# EAGLE board PCB_2.1 (EAGLE 7.6.0)
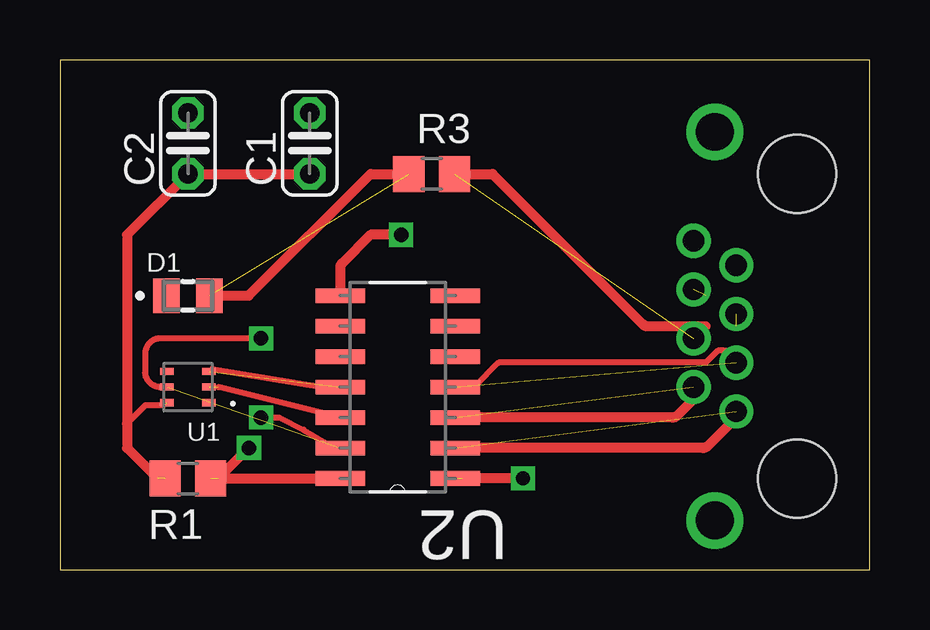
[diagram p0: board, top side]
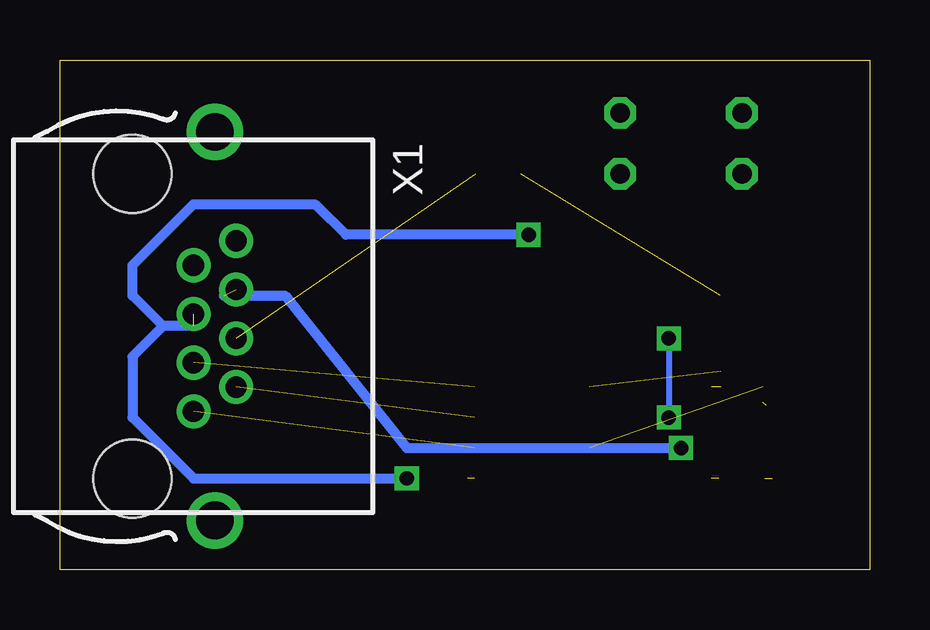
[diagram p1: board, bottom side, seen from below]

Size 33.76 x 21.26 mm. Coordinates in mm from the lower left corner, seen from the top.
Outline: 0,0 33.76,0 33.76,21.26 0,21.26 0,0
Copper layers (1*16): Top 0.035mm / dielectric 1.5mm / Bottom 0.035mm
Design rules "default": minimum track width 10mil, minimum drill 24mil, track to track 8mil, track to pad 8mil, pad to pad 8mil, via to via 8mil, smd to smd 8mil, copper to edge 40mil, drill to drill 8mil, minimum pad ring 10mil, minimum via ring 8mil, stop-mask expansion 4mil, vias tented up to drill 0mil, thermal gap 10mil
tRestrict: 8 lines

## Footprints (pad centres in the part's own frame; a part is rotated, then mirrored left to right if it is on the bottom)
C025-024X044 = drill 0.813 octagon: 1 -1.27,0; 2 1.27,0
LEDC2012X70N = smd 1.1 x 1.45: A 0.9,0; C -0.9,0
R0805 = smd 1.3 x 1.5: 1 -0.95,0; 2 0.95,0
VISHAY_VEML6030_2X2X0.87 = smd 0.55 x 0.3: 1 -0.875,0.65; 2 -0.875,0; 3 -0.875,-0.65; 4 0.875,-0.65; 5 0.875,0; 6 0.875,0.65
SOIC127P600X175-14N = smd 2.057 x 0.61: 1 -4.801,7.62; 2 -4.801,6.35; 3 -4.801,5.08; 4 -4.801,3.81; 5 -4.801,2.54; 6 -4.801,1.27; 7 -4.801,0; 8 0,0; 9 0,1.27; 10 0,2.54; 11 0,3.81; 12 0,5.08; 13 0,6.35; 14 0,7.62
0446200002 = drill 0.889 pad 1.422: 1 3.556,2.54; 2 2.54,4.318; 3 1.524,2.54; 4 0.508,4.318; 5 -0.508,2.54; 6 -1.524,4.318; 7 -2.54,2.54; 8 -3.556,4.318 | drill 1.575 pad 2.286: S@1 -8.103,3.429; S@2 8.103,3.429 | hole 3.251: 6.35,0; -6.35,0

## Placement (x,y rotation side)
C1  [C025-024X044]  10.41,17.78 90 top
C2  [C025-024X044]  5.33,17.78 90 top
D1  5988170107F  [LEDC2012X70N]  5.33,11.43 0 top
R1  [R0805]  5.33,3.81 180 top
R3  [R0805]  15.49,16.51 0 top
U1  VEML6030  [VISHAY_VEML6030_2X2X0.87]  5.33,7.62 180 top
U2  TXS0104ED  [SOIC127P600X175-14N]  11.68,11.43 180 top
X1  0446200002  [0446200002]  30.73,10.16 270 bottom

## Library data of the parts
C1 C2 R1 R3 = resistor
D1 = 5988170107F; AVAILABILITY: Unavailable; DESCRIPTION: LED GREEN CLEAR 0805 SMD; MF: Dialight; MP: 5988170107F; PACKAGE: 0805 Dialight; PRICE: None
U1 = VEML6030; AVAILABILITY: Unavailable; DESCRIPTION: VEML6030 Series 2 x 2 x 0.85 mm 50 mW I2C High Accuracy Ambient Light Sensor; MF: Vishay; MP: VEML6030; PACKAGE: SMD-6 Vishay; PRICE: None
U2 = TXS0104ED; AVAILABILITY: Unavailable; DESCRIPTION: 4-Bit Bidirectional Voltage-Level Shifter for Open-Drain and Push-Pull Applications 14-SOIC -40 to 85; MF: Texas Instruments; MP: TXS0104ED; PACKAGE: SOIC-14 Texas Instruments; PRICE: None
X1 = 0446200002; AVAILABILITY: Unavailable; DESCRIPTION: Conn RJ-45 RCP 8 POS 2.04mm Solder RA Thru-Hole 8 Terminal 1 Port Tray Cat 3; MF: Molex, LLC; MP: 0446200002; PACKAGE: None; PRICE: None

## Nets
GND: U1.1
N$1: C1.1 C2.1 R1.2 U1.6
N$3: U1.5 U2.13
N$4: U1.3 U2.11
N$5: U1.2 U2.12
N$6: D1.A R3.1
N$7: U2.2 X1.1
N$8: U2.3 X1.2
N$9: U2.4 X1.3
N$10: R1.1 U2.14 X1.6
N$12: R3.2 X1.4
N$17: U2.1 U2.8 X1.5

## Tracks (layer width: path | path; a pad name or v marks a point on that pad's centre or on a via)
N$1  (2 unrouted)
  Top 0.254: 4.32,6.86 3.56,6.86 2.79,6.1
  Top 0.406: C1.1 C2.1 2.79,13.97 2.79,6.1 2.79,5.08 4.06,3.81
N$2
  Top 0.406: 16.76,16.51 18.03,16.51 24.31,10.23 arc45 24.49,10.16 26.92,10.16
N$3  (1 unrouted)
N$4  (1 unrouted)
N$5  (1 unrouted)
  Top 0.254: U2.12 6.6,7.62
N$6  (1 unrouted)
N$7  (1 unrouted)
N$8  (1 unrouted)
N$9  (1 unrouted)
N$10  (via drill 0.6)  (2 unrouted)
  Top 0.406: v7.87,5.08 6.6,3.81 U2.14
  Bottom 0.406: 26.92,11.43 24.38,11.43 19.3,5.08 v7.87,5.08
N$11
  Top 0.254: 17.27,7.62 18.29,8.64 26.92,8.64 27.43,9.14 27.69,9.14 28.45,9.14
N$12  (1 unrouted)
N$13
  Top 0.406: 6.6,11.43 7.87,11.43 12.95,16.51 14.22,16.51
N$14
  Top 0.254: 6.35,8.38 10.92,7.62
N$15
  Top 0.406: 28.19,6.35 27,5.15 arc-45 26.82,5.08 16.76,5.08
N$16
  Top 0.406: 26.92,7.62 25.73,6.42 arc-45 25.55,6.35 16.76,6.35
N$17  (via drill 0.6)  (2 unrouted)
  Top 0.406: v14.22,13.97 12.95,13.97 11.76,12.77 arc45 11.68,12.59 U2.8 | v19.3,3.81 16.76,3.81
  Bottom 0.406: v14.22,13.97 21.84,13.97 23.04,15.17 arc-45 23.22,15.24 28.19,15.24 30.73,12.7 30.73,11.43 29.46,10.16 | 29.46,10.16 30.73,8.89 30.73,6.35 28.19,3.81 v19.3,3.81 | 28.19,10.16 29.46,10.16
N$18  (via drill 0.6)
  Top 0.254: v8.38,6.35 9.14,6.35 10.16,5.84 11.43,5.08 | v8.38,9.65 4.19,9.65 arc90 3.56,9.02 3.56,8.25 arc90 4.19,7.62 4.32,7.62
  Bottom 0.254: v8.38,9.65 v8.38,6.35